# Altium PCB 遥控器.PcbDoc (part 2 of 2)
Units mil, origin at the board's own origin, x right, y up, seen from the top; angles counter-clockwise.
Board outline 3238.38 x 2687.2 mil, 2 copper layers (Top Layer, Bottom Layer); 70 components, 52 nets, 262 pads, 78 vias.
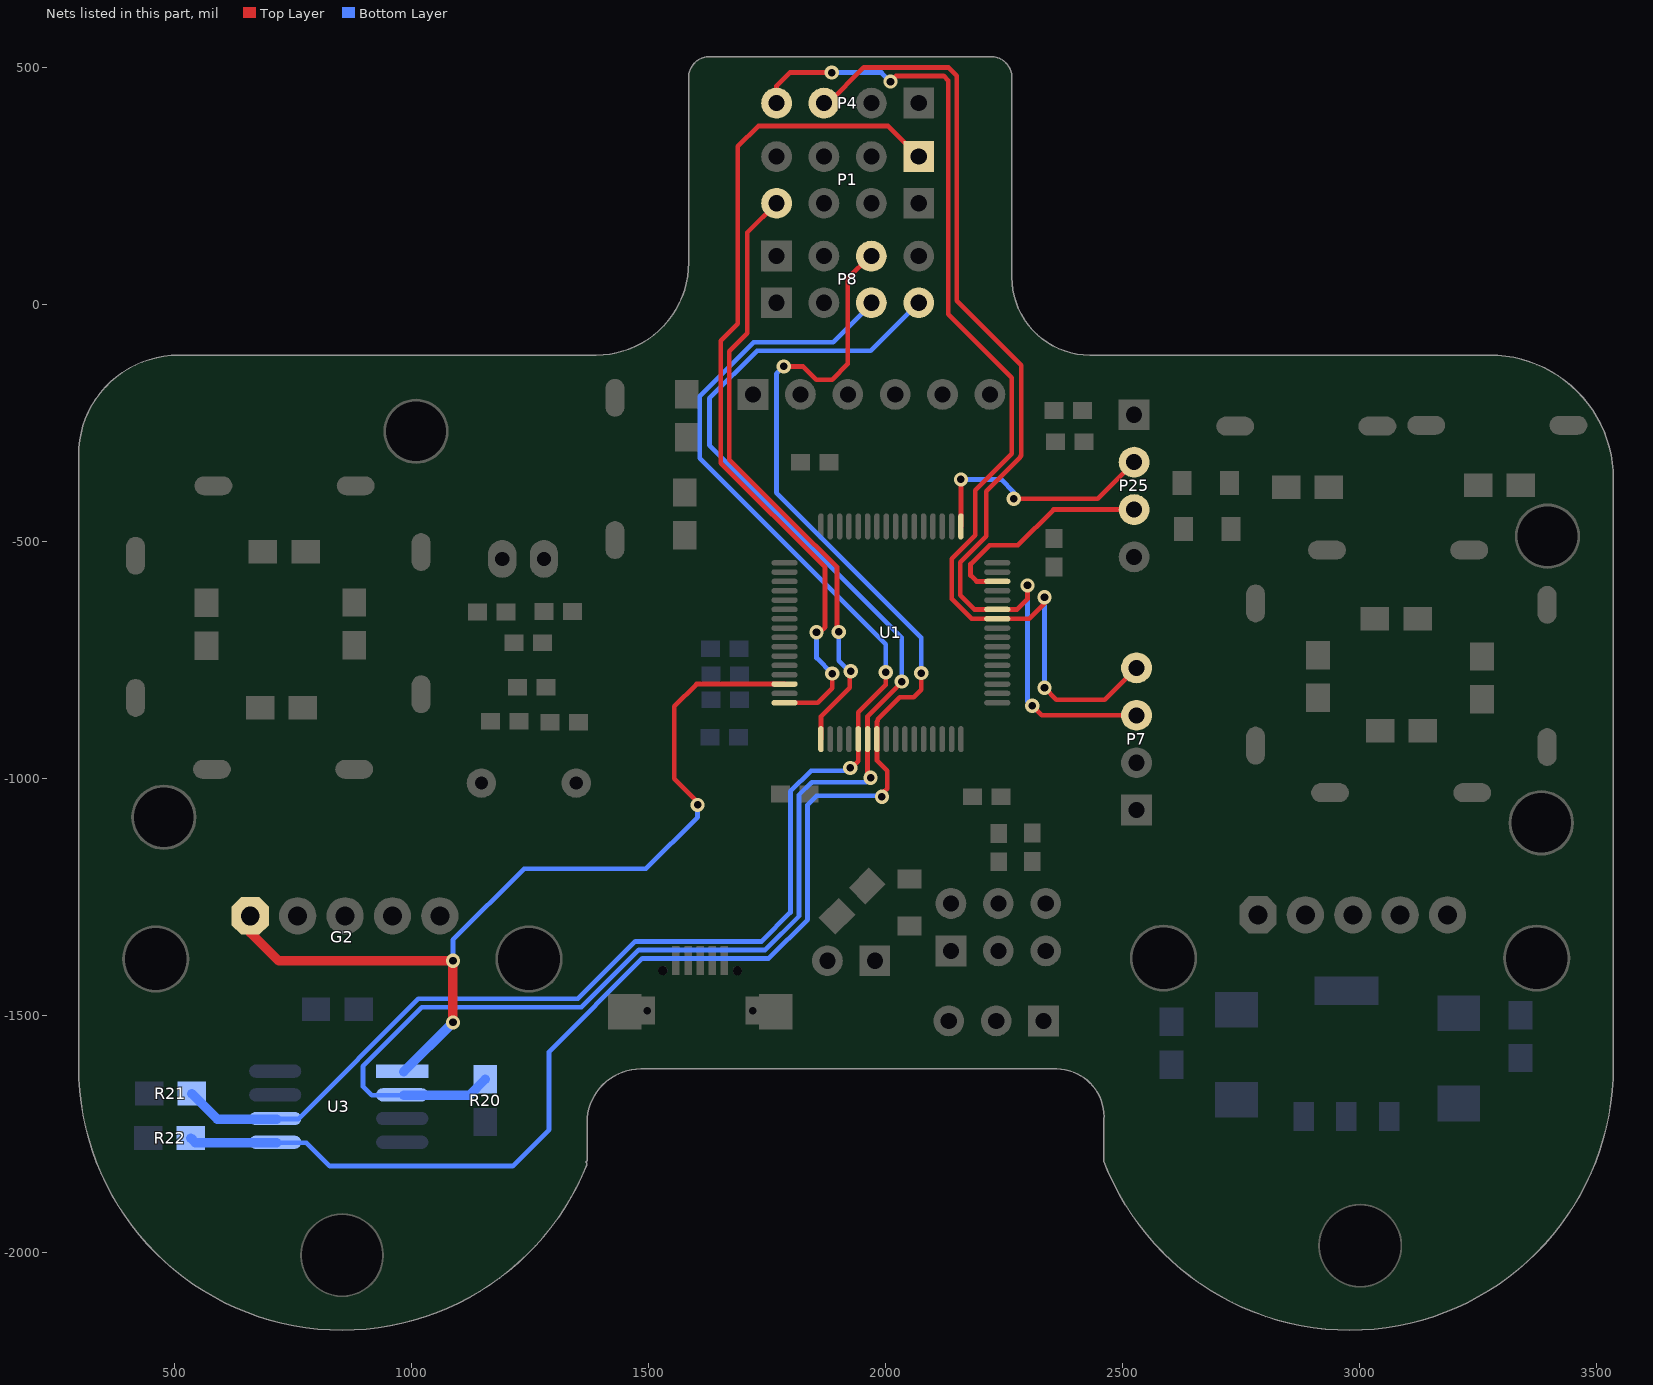
[diagram p2: the nets of this part, all layers, seen from the top]

## Via types
v1: diameter 30, hole 16, Top Layer to Bottom Layer, 42 vias
v2: diameter 50, hole 25, Top Layer to Bottom Layer, 12 vias
v3: diameter 30, hole 15, Top Layer to Bottom Layer, 10 vias
v4: diameter 40, hole 20, Top Layer to Bottom Layer, 9 vias
v5: diameter 40, hole 25, Top Layer to Bottom Layer, 5 vias

## Nets (pads, with @x,y where several pads share a name; then routed paths per layer and width w, separated by ;. In a path a pad name is that pad's centre, name@x,y a point inside that pad or via, vN(x,y) a via of type N, cw(c..) or ccw(c..) an arc to the next point about the centre after c; other vN are vias at no path point) (continued)
SPI1_CLK: P8.5 R21.1 U1.21 U3.6 | length 3297.1
  Top Layer w10: v1(1925,-978) 1925,-981 1942.02,-963.98 U1.21@1942.02,-917.32 1942.02,-860.98 2000,-803 v1(2000,-776)
  Bottom Layer w10: U3.6@715.01,-1718.77 760.23,-1718.77 1013.95,-1465.05 1350.61,-1465.05 1471.65,-1344 1738,-1344 1799,-1283 1799,-1027.54 1842.54,-984 1919,-984 v1(1925,-978) ; P8.5@1969.66,3.39 1969.66,0.66 1889,-80 1721.18,-80 1607.5,-193.68 1607.5,-324.5 2000,-717 v1(2000,-776)
  Bottom Layer w20: R21.1@536,-1665 589.77,-1718.77 U3.6@715.01,-1718.77
SPI1_MISO: P8.7 R20.1 U1.22 U3.2 | length 3321.1
  Top Layer w10: v1(1968,-999) 1968,-1000.42 1961.71,-1006.71 U1.22@1961.71,-917.32 1961.71,-869.29 2023,-808
  Bottom Layer w10: U3.2@983.01,-1668.77 915.77,-1668.77 897,-1650 897,-1607.46 1021.41,-1483.05 1358.06,-1483.05 1479.11,-1362 1745.46,-1362 1817,-1290.46 1817,-1035 1844,-1008 1845,-1009 1846,-1008 1959,-1008 v1(1968,-999) ; v1(2034,-796) 2034,-703 1628,-297 1628,-198.64 1728.64,-98 1968.27,-98 P8.7@2069.66,3.39
  Bottom Layer w20: U3.2@983.01,-1668.77 1121.23,-1668.77 R20.1@1155,-1635
SPI1_MOSI: P8.6 R22.1 U1.23 U3.5 | length 3553.6
  Top Layer w10: v1(1785,-131) 1825.28,-131 1853.28,-159 1886.68,-159 1920,-125.68 1920,55 1966.82,101.82 P8.6@1969.66,101.82 ; v1@1996,-1028.79 2003,-1021.79 2003,-984 1981.75,-962.75 1981.75,-917.68 U1.23@1981.39,-917.32 1981.39,-880.61 1983.08,-878.92 1983.08,-875.47 2029.54,-829 2059,-829 2075,-813 v1(2075,-778)
  Bottom Layer w10: U3.5@715.01,-1768.77 777.77,-1768.77 827,-1818 1213,-1818 1289.73,-1741.27 1289.73,-1576.84 1486.57,-1380 1752.91,-1380 1835,-1297.91 1835,-1056 1854,-1037 1990,-1037 v1(1992,-1039) ; v1(1785,-131) 1769.5,-146.5 1769.5,-397.5 2075,-703 v1(2075,-778)
  Bottom Layer w20: R22.1@534,-1759 543.77,-1768.77 U3.5@715.01,-1768.77
SWCLK: P25.2 U1.49 | length 521.4
  Top Layer w10: U1.49@2158.56,-468.5 v1(2158.56,-369.44) ; v1(2270,-410) 2446.88,-410 P25.2@2523.95,-332.93
  Bottom Layer w10: v1(2158.56,-369.44) 2243.44,-369.44 2270,-396 v1(2270,-410)
SWDIO: P25.3 U1.46 | length 478.2
  Top Layer w10: U1.46@2235.33,-584.65 2191.65,-584.65 2179,-572 2179,-548 2219,-508 2279,-508 2354.07,-432.93 P25.3@2523.95,-432.93
USART1_RX: P4.3 P7.3 U1.43 | length 2203.5
  Top Layer w10: P4.3@1869.66,424.56 1878.73,424.56 1954,499.83 2132.17,499.83 2150,482 2150,7.46 2286,-128.54 2286,-319 2284,-321 2284,-322.46 2212,-394.46 2212,-489.54 2157,-544.54 2157,-614 2186.7,-643.7 U1.43@2235.33,-643.7 2277.3,-643.7 2299,-622 v1(2299,-593) ; v1(2309,-847) 2329.07,-867.07 P7.3@2529.05,-867.07
  Bottom Layer w10: v1(2299,-593) 2299,-837 v1(2309,-847)
USART1_TX: P4.4 P7.4 U1.42 | length 2291.6
  Top Layer w10: P4.4@1769.66,424.56 1769.66,460.66 1798,489 v1(1886,489) ; v1(2010,470) 2021.83,481.83 2122.29,481.83 2132,472.12 2132,-21 2266,-155 2266,-315 2189,-392 2189,-487.09 2139,-537.09 2139,-621.46 2180.93,-663.39 U1.42@2235.33,-663.39 2302.61,-663.39 2335,-631 v1(2335,-618) ; v1(2335,-809) 2360,-834 2462.12,-834 P7.4@2529.05,-767.07
  Bottom Layer w10: v1(1886,489) 1991,489 v1(2010,470) ; v1(2335,-809) v1(2335,-618)
USART2_RX: P1.8 U1.17 | length 1309.1
  Top Layer w10: P1.8@1769.66,213.2 1708,151.54 1708,-61 1670,-99 1670,-327.54 1850.5,-508.04 1851.04,-508.04 1897,-554 1897,-687 v1(1901,-691) ; U1.17@1863.28,-917.32 1863.28,-869.72 1924,-809 v1@1924,-770
  Bottom Layer w10: v1(1901,-691) 1901,-752 1923,-774 v1(1926,-774)
USART2_TX: P1.1 U1.16 | length 1813.5
  Top Layer w10: U1.16@1786.51,-840.55 1856.45,-840.55 1887,-810 v1(1887,-779) ; v1(1854,-692) 1861,-692 1872,-681 1872,-555 1652,-335 1652,-77 1688,-41 1688,333 1731,376 2005.29,376 P1.1@2069.66,311.63
  Bottom Layer w10: v1(1854,-692) 1854,-746 v1(1887,-779)
W25_CS: G2.1 U1.14 U3.1 | length 1938.1
  Top Layer w10: v1(1603,-1056) 1603,-1050 1554,-1001 1554,-848 1600.82,-801.18 U1.14@1786.51,-801.18
  Top Layer w20: G2.1@659.33,-1290.08 659.33,-1325.33 719,-1385 v1(1087,-1385) v1(1087,-1515)
  Bottom Layer w10: v1(1087,-1385) 1087,-1341 1237,-1191 1494,-1191 1603,-1082 v1(1603,-1056)
  Bottom Layer w20: U3.1@983.01,-1618.77 1086.78,-1515 v1(1087,-1515)
pads on no net: G1.0 G2.0 P0.3 P1.3 P1.4 P1.5 U1.1 U1.2 U1.30 U1.34 U1.35 U1.44 U1.45 U1.50 U1.51 U1.52 U1.53 U1.54 U1.57 USB. USB.2 USB.3 USB.4 USB.6
copper on no net: | length 11328.6
  Top Layer w0.2: 2172.4,277.2 2188.8,277.2 ; 2172.4,277.4 2189.2,277.4 ; 2172.6,277 2188.4,277 ; 2172.6,277.6 2189.6,277.6 ; 2172.8,276.8 2188,276.8 ; 2172.8,277.8 2190,277.8 ; 2173,276.6 2187.6,276.6 ; 2173,278 2190.4,278 ; 2173.2,276.4 2187.4,276.4 ; 2173.2,278.2 2190.8,278.2 ; 2173.4,276.2 2187,276.2 ; 2173.4,278.4 2191.2,278.4 ; 2173.6,276 2186.6,276 ; 2173.6,278.6 2191.6,278.6 ; 2173.8,275.8 2186.4,275.8 ; 2173.8,278.8 2192.2,278.8 ; 2174,275.6 2186,275.6 ; 2174,279 2192.6,279 ; 2174.2,275.4 2185.8,275.4 ; 2174.2,279.2 2193,279.2 ; 2174.4,275.2 2185.4,275.2 ; 2174.6,275 2185.2,275 ; 2174.6,279.4 2193.6,279.4 ; 2174.8,274.8 2184.8,274.8 ; 2174.8,279.6 2194.2,279.6 ; 2175,274.6 2184.6,274.6 ; 2175,279.8 2194.8,279.8 ; 2175.2,274.4 2184.2,274.4 ; 2175.2,280 2195.4,280 ; 2175.4,274.2 2184,274.2 ; 2175.4,280.2 2196,280.2 ; 2175.6,274 2183.8,274 ; 2175.6,280.4 2196.6,280.4 ; 2175.8,273.8 2183.4,273.8 ; 2176,273.6 2183.2,273.6 ; 2176,280.6 2197.4,280.6 ; 2176.2,273.4 2183,273.4 ; 2176.2,280.8 2198.2,280.8 ; 2176.4,273.2 2182.6,273.2 ; 2176.4,281 2199,281 ; 2176.6,273 2182.4,273 ; 2176.6,281.2 2200,281.2 ; 2176.8,272.8 2182.2,272.8 ; 2177,272.6 2182,272.6 ; 2177,281.4 2201.2,281.4 ; 2177.2,272.4 2181.8,272.4 ; 2177.2,281.6 2202.6,281.6 ; 2177.4,272.2 2181.4,272.2 ; 2177.4,281.8 2204.6,281.8 ; 2177.6,272 2181.2,272 ; 2177.8,271.8 2181,271.8 ; 2177.8,282 2237.4,282 ; 2178,271.6 2180.8,271.6 ; 2178,282.2 2237.2,282.2 ; 2178.2,271.4 2180.6,271.4 ; 2178.2,282.4 2237,282.4 ; 2178.4,271.2 2180.4,271.2 ; 2178.6,271 2180.2,271 ; 2178.6,282.6 2236.6,282.6 ; 2178.8,270.8 2180,270.8 ; 2178.8,282.8 2236.4,282.8 ; 2179,270.6 2179.8,270.6 ; 2179.2,270.4 2179.6,270.4 ; 2179.2,283 2236,283 ; 2179.4,283.2 2235.8,283.2 ; 2179.6,283.4 2235.6,283.4 ; 2180,283.6 2235.2,283.6 ; 2180.4,283.8 2235,283.8 ; 2180.6,284 2234.6,284 ; 2181,284.2 2234.2,284.2 ; 2181.2,284.4 2234,284.4 ; 2181.6,284.6 2233.6,284.6 ; 2181.8,284.8 2233.4,284.8 ; 2182.2,285 2233,285 ; 2182.6,285.2 2232.6,285.2 ; 2183,285.4 2232.2,285.4 ; 2183.2,285.6 2232,285.6 ; 2183.6,285.8 2231.6,285.8 ; 2184,286 2231.2,286 ; 2184.4,286.2 2230.8,286.2 ; 2184.8,286.4 2230.4,286.4 ; 2185.2,286.6 2230,286.6 ; 2185.6,286.8 2229.6,286.8 ; 2186,287 2229.2,287 ; 2186.4,263.2 2228.8,263.2 ; 2186.4,287.2 2228.8,287.2 ; 2186.6,263 2228.8,263 ; 2186.6,263.4 2228.6,263.4 ; 2186.8,262.8 2228.6,262.8 ; 2186.8,263.6 2228.4,263.6 ; 2186.8,287.4 2228.4,287.4 ; 2187,262.6 2228.4,262.6 ; 2187,263.8 2228.2,263.8 ; 2187.2,262.4 2228.2,262.4 ; 2187.2,264 2228,264 ; 2187.2,287.6 2228,287.6 ; 2187.4,262.2 2228,262.2 ; 2187.6,262 2227.8,262 ; 2187.6,264.2 2227.6,264.2 ; 2187.8,261.8 2205.4,261.8 ; 2187.8,264.4 2227.4,264.4 ; 2187.8,287.8 2227.4,287.8 ; 2188,261.6 2204,261.6 ; 2188,264.6 2227.2,264.6 ; 2188.2,261.4 2203,261.4 ; 2188.2,264.8 2227,264.8 ; 2188.2,288 2227,288 ; 2188.4,261.2 2202.2,261.2 ; 2188.4,265 2226.8,265 ; 2188.6,261 2201.6,261 ; 2188.6,265.2 2226.6,265.2 ; 2188.6,288.2 2226.6,288.2 ; 2188.8,260.8 2201,260.8 ; 2189,260.6 2200.4,260.6 ; 2189,265.4 2226.2,265.4 ; 2189.2,260.4 2200,260.4 ; 2189.2,265.6 2226,265.6 ; 2189.2,288.4 2226,288.4 ; 2189.4,260.2 2199.4,260.2 ; 2189.4,265.8 2225.8,265.8 ; 2189.6,260 2199,260 ; 2189.6,266 2225.6,266 ; 2189.8,259.8 2198.6,259.8 ; 2189.8,288.6 2225.4,288.6 ; 2190,259.6 2198.2,259.6 ; 2190,266.2 2225.2,266.2 ; 2190.2,259.4 2197.8,259.4 ; 2190.2,266.4 2225,266.4 ; 2190.2,288.8 2225,288.8 ; 2190.4,259.2 2197.6,259.2 ; 2190.6,259 2197.2,259 ; 2190.6,266.6 2224.6,266.6 ; 2190.8,258.8 2196.8,258.8 ; 2190.8,266.8 2224.4,266.8 ; 2190.8,289 2224.4,289 ; 2191,258.6 2196.6,258.6 ; 2191.2,258.4 2196.2,258.4 ; 2191.2,267 2224,267 ; 2191.4,258.2 2196,258.2 ; 2191.4,267.2 2223.8,267.2 ; 2191.4,289.2 2223.8,289.2 ; 2191.6,258 2195.6,258 ; 2191.8,257.8 2195.4,257.8 ; 2191.8,267.4 2223.4,267.4 ; 2192,257.6 2195.2,257.6 ; 2192,267.6 2223.2,267.6 ; 2192,289.4 2223.2,289.4 ; 2192.2,257.4 2195,257.4 ; 2192.4,257.2 2194.6,257.2 ; 2192.4,267.8 2222.8,267.8 ; 2192.6,257 2194.4,257 ; 2192.6,289.6 2222.6,289.6 ; 2192.8,256.8 2194.2,256.8 ; 2192.8,268 2222.4,268 ; 2193,256.6 2194,256.6 ; 2193.2,256.4 2193.8,256.4 ; 2193.2,268.2 2222,268.2 ; 2193.2,289.8 2222,289.8 ; 2193.4,256.2 2193.6,256.2 ; 2193.4,268.4 2221.8,268.4 ; 2193.8,268.6 2221.4,268.6 ; 2193.8,290 2221.4,290 ; 2194.2,268.8 2221,268.8 ; 2194.6,269 2220.6,269 ; 2194.6,290.2 2220.6,290.2 ; 2195,269.2 2220,269.2 ; 2195.4,290.4 2219.8,290.4 ; 2195.6,269.4 2219.6,269.4 ; 2196,269.6 2219.2,269.6 ; 2196.2,290.6 2219,290.6 ; 2196.6,269.8 2218.6,269.8 ; 2197,270 2218.2,270 ; 2197.2,290.8 2218,290.8 ; 2197.6,270.2 2217.6,270.2 ; 2198.2,270.4 2217,270.4 ; 2198.2,291 2217,291 ; 2198.8,270.6 2216.4,270.6 ; 2199.2,291.2 2216,291.2 ; 2199.4,270.8 2215.8,270.8 ; 2200.2,271 2215,271 ; 2200.6,249 2214.6,249 ; 2200.6,291.4 2214.6,291.4 ; 2200.8,248.8 2214.6,248.8 ; 2200.8,249.2 2214.4,249.2 ; 2201,248.6 2214.4,248.6 ; 2201,249.4 2214.2,249.4 ; 2201,271.2 2214.2,271.2 ; 2201.2,248.4 2214.2,248.4 ; 2201.2,249.6 2214,249.6 ; 2201.4,248.2 2214,248.2 ; 2201.4,249.8 2213.8,249.8 ; 2201.6,248 2213.8,248 ; 2201.6,250 2213.6,250 ; 2201.8,247.8 2213.6,247.8 ; 2202,247.6 2213.4,247.6 ; 2202,250.2 2213.2,250.2 ; 2202,271.4 2213.2,271.4 ; 2202.2,247.4 2213.2,247.4 ; 2202.2,250.4 2213,250.4 ; 2202.2,291.6 2213,291.6 ; 2202.4,247.2 2213,247.2 ; 2202.6,247 2212.8,247 ; 2202.6,250.6 2212.6,250.6 ; 2202.8,246.8 2212.6,246.8 ; 2203,246.6 2212.4,246.6 ; 2203,250.8 2212.2,250.8 ; 2203.2,246.4 2212.2,246.4 ; 2203.2,271.6 2212,271.6 ; 2203.4,246.2 2212,246.2 ; 2203.4,251 2211.8,251 ; 2203.6,246 2211.8,246 ; 2203.8,245.8 2211.6,245.8 ; 2203.8,251.2 2211.4,251.2 ; 2204,245.6 2211.4,245.6 ; 2204.2,245.4 2211.2,245.4 ; 2204.4,245.2 2211,245.2 ; 2204.4,251.4 2210.8,251.4 ; 2204.4,291.8 2210.8,291.8 ; 2204.6,245 2210.8,245 ; 2204.8,244.8 2210.6,244.8 ; 2205,244.6 2210.4,244.6 ; 2205,251.6 2210.2,251.6 ; 2205,271.8 2210.2,271.8 ; 2205.2,244.4 2210.2,244.4 ; 2205.4,244.2 2210,244.2 ; 2205.6,244 2209.8,244 ; 2205.8,243.8 2209.6,243.8 ; 2206,243.6 2209.4,243.6 ; 2206,251.8 2209.2,251.8 ; 2206.2,243.4 2209.2,243.4 ; 2206.4,243.2 2209,243.2 ; 2206.6,243 2208.8,243 ; 2206.8,242.8 2208.6,242.8 ; 2207,242.6 2208.4,242.6 ; 2207.2,242.4 2208.2,242.4 ; 2207.4,242.2 2208,242.2 ; 2207.6,242 2207.8,242 ; 2209.8,261.8 2227.6,261.8 ; 2210.6,281.8 2237.8,281.8 ; 2211.2,261.6 2227.4,261.6 ; 2212.2,261.4 2227.2,261.4 ; 2212.6,281.6 2238,281.6 ; 2213,261.2 2227,261.2 ; 2213.6,261 2226.8,261 ; 2214,281.4 2238.2,281.4 ; 2214.2,260.8 2226.6,260.8 ; 2214.8,260.6 2226.4,260.6 ; 2215.2,260.4 2226.2,260.4 ; 2215.2,281.2 2238.6,281.2 ; 2215.8,260.2 2226,260.2 ; 2216.2,260 2225.8,260 ; 2216.2,281 2238.8,281 ; 2216.6,259.8 2225.6,259.8 ; 2217,259.6 2225.4,259.6 ; 2217,280.8 2239,280.8 ; 2217.4,259.4 2225.2,259.4 ; 2217.6,259.2 2225,259.2 ; 2217.8,280.6 2239.2,280.6 ; 2218,259 2224.8,259 ; 2218.4,258.8 2224.6,258.8 ; 2218.6,258.6 2224.4,258.6 ; 2218.6,280.4 2239.6,280.4 ; 2219,258.4 2224.2,258.4 ; 2219.2,258.2 2224,258.2 ; 2219.2,280.2 2239.8,280.2 ; 2219.6,258 2223.8,258 ; 2219.8,257.8 2223.6,257.8 ; 2219.8,280 2240,280 ; 2220,257.6 2223.4,257.6 ; 2220.2,257.4 2223.2,257.4 ; 2220.4,279.8 2240.2,279.8 ; 2220.6,257.2 2223,257.2 ; 2220.8,257 2222.8,257 ; 2221,256.8 2222.6,256.8 ; 2221,279.6 2240.4,279.6 ; 2221.2,256.6 2222.4,256.6 ; 2221.4,256.4 2222.2,256.4 ; 2221.6,256.2 2222,256.2 ; 2221.6,279.4 2240.6,279.4 ; 2222.2,279.2 2241,279.2 ; 2222.6,279 2241.2,279 ; 2223,278.8 2241.4,278.8 ; 2223.6,278.6 2241.6,278.6 ; 2224,278.4 2241.8,278.4 ; 2224.4,278.2 2242,278.2 ; 2224.8,278 2242.2,278 ; 2225.2,277.8 2242.4,277.8 ; 2225.6,277.6 2242.6,277.6 ; 2226,277.4 2242.8,277.4 ; 2226.4,277.2 2243,277.2 ; 2226.8,277 2242.8,277 ; 2227.2,276.8 2242.6,276.8 ; 2227.6,276.6 2242.4,276.6 ; 2227.8,276.4 2242.2,276.4 ; 2228.2,276.2 2242,276.2 ; 2228.6,276 2241.8,276 ; 2228.8,275.8 2241.6,275.8 ; 2229.2,275.6 2241.4,275.6 ; 2229.4,275.4 2241.2,275.4 ; 2229.8,275.2 2241,275.2 ; 2230,275 2240.8,275 ; 2230.4,274.8 2240.6,274.8 ; 2230.6,274.6 2240.4,274.6 ; 2231,274.4 2240.2,274.4 ; 2231.2,274.2 2240,274.2 ; 2231.4,274 2239.8,274 ; 2231.8,273.8 2239.6,273.8 ; 2232,273.6 2239.4,273.6 ; 2232.2,273.4 2239.2,273.4 ; 2232.6,273.2 2239,273.2 ; 2232.8,273 2238.8,273 ; 2233,272.8 2238.6,272.8 ; 2233.2,272.6 2238.4,272.6 ; 2233.4,272.4 2238.2,272.4 ; 2233.8,272.2 2238,272.2 ; 2234,272 2237.8,272 ; 2234.2,271.8 2237.6,271.8 ; 2234.4,271.6 2237.4,271.6 ; 2234.6,271.4 2237.2,271.4 ; 2234.8,271.2 2237,271.2 ; 2235,271 2236.8,271 ; 2235.2,270.8 2236.6,270.8 ; 2235.4,270.6 2236.4,270.6 ; 2235.6,270.4 2236.2,270.4
  Top Layer w0.4: 2170.6,439.4 2185.8,439.4 ; 2171.4,405.4 2185.8,405.4 ; 2171.4,405.8 2186.6,405.8 ; 2171.4,439 2186.6,439 ; 2171.4,439.8 2185,439.8 ; 2171.8,405 2185,405 ; 2171.8,440.2 2184.6,440.2 ; 2172.2,406.2 2187,406.2 ; 2172.2,438.6 2187.4,438.6 ; 2172.6,404.6 2184.2,404.6 ; 2172.6,406.6 2187.8,406.6 ; 2172.6,440.6 2183.8,440.6 ; 2173,407 2188.6,407 ; 2173,438.2 2187.8,438.2 ; 2173.4,404.2 2183.8,404.2 ; 2173.4,437.8 2188.6,437.8 ; 2173.4,441 2183,441 ; 2173.8,407.4 2189,407.4 ; 2174.2,403.8 2183,403.8 ; 2174.2,407.8 2189.8,407.8 ; 2174.2,437.4 2189,437.4 ; 2174.2,441.4 2182.6,441.4 ; 2174.6,403.4 2182.2,403.4 ; 2174.6,441.8 2181.8,441.8 ; 2175,437 2189.8,437 ; 2175.4,403 2181.8,403 ; 2175.4,408.2 2190.6,408.2 ; 2175.4,442.2 2181,442.2 ; 2175.8,436.6 2190.6,436.6 ; 2176.2,402.6 2181,402.6 ; 2176.2,408.6 2191,408.6 ; 2176.2,436.2 2191.4,436.2 ; 2176.2,442.6 2180.6,442.6 ; 2176.6,402.2 2180.6,402.2 ; 2176.6,409 2191.8,409 ; 2176.6,443 2179.8,443 ; 2177,435.8 2191.8,435.8 ; 2177.4,401.8 2179.8,401.8 ; 2177.4,409.4 2192.6,409.4 ; 2177.4,443.4 2179,443.4 ; 2177.8,409.8 2193,409.8 ; 2177.8,435.4 2192.6,435.4 ; 2178.2,401.4 2179,401.4 ; 2178.2,410.2 2193.8,410.2 ; 2178.2,435 2193,435 ; 2178.2,443.8 2178.6,443.8 ; 2179,410.6 2194.2,410.6 ; 2179,434.6 2193.8,434.6 ; 2179.8,411 2195.4,411 ; 2179.8,434.2 2194.6,434.2 ; 2180.2,411.4 2195.8,411.4 ; 2180.2,433.8 2195,433.8 ; 2181,411.8 2196.6,411.8 ; 2181,433.4 2195.8,433.4 ; 2181.4,433 2196.6,433 ; 2181.8,412.2 2197,412.2 ; 2182.2,412.6 2197.8,412.6 ; 2182.2,432.6 2197,432.6 ; 2183,413 2198.6,413 ; 2183,432.2 2197.8,432.2 ; 2183.8,413.4 2199.4,413.4 ; 2183.8,431.8 2198.6,431.8 ; 2184.2,431.4 2199.4,431.4 ; 2184.6,413.8 2199.8,413.8 ; 2185,414.2 2228.2,414.2 ; 2185,431 2228.6,431 ; 2185.8,414.6 2227.4,414.6 ; 2185.8,430.6 2227.8,430.6 ; 2186.2,430.2 2227.4,430.2 ; 2186.6,415 2226.6,415 ; 2187,415.4 2226.2,415.4 ; 2187,429.8 2226.6,429.8 ; 2187.4,429.4 2225.8,429.4 ; 2187.8,415.8 2225.4,415.8 ; 2188.2,429 2225,429 ; 2188.6,416.2 2224.6,416.2 ; 2189,416.6 2224.2,416.6 ; 2189,428.6 2224.6,428.6 ; 2189.8,417 2223.4,417 ; 2189.8,428.2 2223.8,428.2 ; 2190.2,427.8 2223.4,427.8 ; 2190.6,417.4 2222.6,417.4 ; 2191,427.4 2222.6,427.4 ; 2191.4,417.8 2222.2,417.8 ; 2191.8,418.2 2221.4,418.2 ; 2191.8,427 2221.8,427 ; 2192.2,426.6 2221.4,426.6 ; 2192.6,418.6 2220.6,418.6 ; 2193,426.2 2220.6,426.2 ; 2193.4,419 2220.2,419 ; 2193.8,419.4 2219.4,419.4 ; 2193.8,425.8 2219.8,425.8 ; 2194.2,425.4 2219.4,425.4 ; 2194.6,419.8 2218.6,419.8 ; 2195,420.2 2218.2,420.2 ; 2195,425 2218.6,425 ; 2195.8,420.6 2217.4,420.6 ; 2195.8,424.6 2217.8,424.6 ; 2196.2,424.2 2217,424.2 ; 2196.6,421 2216.6,421 ; 2196.6,423.8 2216.6,423.8 ; 2197,421.4 2216.2,421.4 ; 2197.4,423.4 2215.8,423.4 ; 2197.8,421.8 2215.4,421.8 ; 2198.2,422.2 2214.6,422.2 ; 2198.2,422.6 2214.6,422.6 ; 2198.2,423 2215,423 ; 2201,413.8 2212.6,413.8 ; 2201.4,381 2202.2,381 ; 2201.4,381.4 2202.6,381.4 ; 2201.4,381.8 2203.4,381.8 ; 2201.4,382.2 2204.2,382.2 ; 2201.4,382.6 2204.6,382.6 ; 2201.4,383 2205.4,383 ; 2201.4,383.4 2206.2,383.4 ; 2201.4,383.8 2206.6,383.8 ; 2201.4,384.2 2207.4,384.2 ; 2201.4,384.6 2208.2,384.6 ; 2201.4,385 2208.6,385 ; 2201.4,385.4 2209.4,385.4 ; 2201.4,385.8 2209.8,385.8 ; 2201.4,386.2 2210.6,386.2 ; 2201.4,386.6 2211.4,386.6 ; 2201.4,387 2212.2,387 ; 2201.4,387.4 2212.6,387.4 ; 2201.4,387.8 2213.4,387.8 ; 2201.4,388.2 2214.2,388.2 ; 2201.4,388.6 2214.6,388.6 ; 2201.4,389 2215.4,389 ; 2201.4,389.4 2216.2,389.4 ; 2201.4,389.8 2217,389.8 ; 2201.4,390.2 2217.4,390.2 ; 2201.4,390.6 2218.2,390.6 ; 2201.4,391 2219,391 ; 2201.4,391.4 2219.4,391.4 ; 2201.4,391.8 2220.2,391.8 ; 2201.4,392.2 2220.6,392.2 ; 2201.4,392.6 2221.4,392.6 ; 2201.4,393 2222.2,393 ; 2201.4,393.4 2222.6,393.4 ; 2201.4,393.8 2223.4,393.8 ; 2201.4,394.2 2224.2,394.2 ; 2201.4,394.6 2225,394.6 ; 2201.4,395 2225.4,395 ; 2201.4,395.4 2226.2,395.4 ; 2201.4,395.8 2227,395.8 ; 2201.4,396.2 2227.4,396.2 ; 2201.4,396.6 2228.2,396.6 ; 2201.4,397 2212.6,397 ; 2201.4,397.4 2212.6,397.4 ; 2201.4,397.8 2212.6,397.8 ; 2201.4,398.2 2212.6,398.2 ; 2201.4,398.6 2212.6,398.6 ; 2201.4,399 2212.6,399 ; 2201.4,399.4 2212.6,399.4 ; 2201.4,399.8 2212.6,399.8 ; 2201.4,400.2 2212.6,400.2 ; 2201.4,400.6 2212.6,400.6 ; 2201.4,401 2212.6,401 ; 2201.4,401.4 2212.6,401.4 ; 2201.4,401.8 2212.6,401.8 ; 2201.4,402.2 2212.6,402.2 ; 2201.4,402.6 2212.6,402.6 ; 2201.4,403 2212.6,403 ; 2201.4,403.4 2212.6,403.4 ; 2201.4,403.8 2212.6,403.8 ; 2201.4,404.2 2212.6,404.2 ; 2201.4,404.6 2212.6,404.6 ; 2201.4,405 2212.6,405 ; 2201.4,405.4 2212.6,405.4 ; 2201.4,405.8 2212.6,405.8 ; 2201.4,406.2 2212.6,406.2 ; 2201.4,406.6 2212.6,406.6 ; 2201.4,407 2212.6,407 ; 2201.4,407.4 2212.6,407.4 ; 2201.4,407.8 2212.6,407.8 ; 2201.4,408.2 2212.6,408.2 ; 2201.4,408.6 2212.6,408.6 ; 2201.4,409 2212.6,409 ; 2201.4,409.4 2212.6,409.4 ; 2201.4,409.8 2212.6,409.8 ; 2201.4,410.2 2212.6,410.2 ; 2201.4,410.6 2212.6,410.6 ; 2201.4,411 2212.6,411 ; 2201.4,411.4 2212.6,411.4 ; 2201.4,411.8 2212.6,411.8 ; 2201.4,412.2 2212.6,412.2 ; 2201.4,412.6 2212.6,412.6 ; 2201.4,413 2212.6,413 ; 2201.4,413.4 2212.2,413.4 ; 2201.4,431.4 2212.2,431.4 ; 2201.4,431.8 2212.6,431.8 ; 2201.4,432.2 2212.6,432.2 ; 2201.4,432.6 2212.2,432.6 ; 2201.4,433 2212.6,433 ; 2201.4,433.4 2212.6,433.4 ; 2201.4,433.8 2212.6,433.8 ; 2201.4,434.2 2212.6,434.2 ; 2201.4,434.6 2212.6,434.6 ; 2201.4,435 2212.6,435 ; 2201.4,435.4 2212.6,435.4 ; 2201.4,435.8 2212.6,435.8 ; 2201.4,436.2 2212.6,436.2 ; 2201.4,436.6 2212.6,436.6 ; 2201.4,437 2212.6,437 ; 2201.4,437.4 2212.6,437.4 ; 2201.4,437.8 2212.6,437.8 ; 2201.4,438.2 2212.6,438.2 ; 2201.4,438.6 2212.6,438.6 ; 2201.4,439 2212.6,439 ; 2201.4,439.4 2212.6,439.4 ; 2201.4,439.8 2212.6,439.8 ; 2201.4,440.2 2212.6,440.2 ; 2201.4,440.6 2212.6,440.6 ; 2201.4,441 2212.6,441 ; 2201.4,441.4 2212.6,441.4 ; 2201.4,441.8 2212.6,441.8 ; 2201.4,442.2 2212.6,442.2 ; 2201.4,442.6 2212.6,442.6 ; 2201.4,443 2212.6,443 ; 2201.4,443.4 2212.6,443.4 ; 2201.4,443.8 2212.6,443.8 ; 2201.4,444.2 2212.6,444.2 ; 2201.4,444.6 2212.6,444.6 ; 2201.4,445 2212.2,445 ; 2201.4,445.4 2212.6,445.4 ; 2201.4,445.8 2212.6,445.8 ; 2201.4,446.2 2212.2,446.2 ; 2201.4,446.6 2212.6,446.6 ; 2201.4,447 2212.6,447 ; 2201.4,447.4 2212.2,447.4 ; 2201.4,447.8 2212.6,447.8 ; 2201.4,448.2 2228.2,448.2 ; 2201.4,448.6 2227.8,448.6 ; 2201.4,449 2227,449 ; 2201.4,449.4 2226.2,449.4 ; 2201.4,449.8 2225.8,449.8 ; 2201.4,450.2 2225,450.2 ; 2201.4,450.6 2224.6,450.6 ; 2201.4,451 2223.8,451 ; 2201.4,451.4 2223,451.4 ; 2201.4,451.8 2222.2,451.8 ; 2201.4,452.2 2221.8,452.2 ; 2201.4,452.6 2221,452.6 ; 2201.4,453 2220.6,453 ; 2201.4,453.4 2219.8,453.4 ; 2201.4,453.8 2219,453.8 ; 2201.4,454.2 2218.2,454.2 ; 2201.4,454.6 2217.8,454.6 ; 2201.4,455 2217,455 ; 2201.4,455.4 2216.2,455.4 ; 2201.4,455.8 2215.8,455.8 ; 2201.4,456.2 2215,456.2 ; 2201.4,456.6 2214.2,456.6 ; 2201.4,457 2213.4,457 ; 2201.4,457.4 2213,457.4 ; 2201.4,457.8 2212.2,457.8 ; 2201.4,458.2 2211.4,458.2 ; 2201.4,458.6 2211,458.6 ; 2201.4,459 2210.2,459 ; 2201.4,459.4 2209.8,459.4 ; 2201.4,459.8 2209,459.8 ; 2201.4,460.2 2208.2,460.2 ; 2201.4,460.6 2207.8,460.6 ; 2201.4,461 2207,461 ; 2201.4,461.4 2206.2,461.4 ; 2201.4,461.8 2205.4,461.8 ; 2201.4,462.2 2205,462.2 ; 2201.4,462.6 2204.2,462.6 ; 2201.4,463 2203.4,463 ; 2201.4,463.4 2203,463.4 ; 2201.4,463.8 2202.2,463.8 ; 2201.4,464.2 2201.8,464.2 ; 2213.4,397 2229,397 ; 2213.4,413.8 2228.6,413.8 ; 2213.8,431.4 2229.4,431.4 ; 2213.8,447.8 2229,447.8 ; 2214.2,397.4 2229.4,397.4 ; 2214.2,413.4 2229.4,413.4 ; 2214.2,447.4 2229.8,447.4 ; 2214.6,431.8 2229.8,431.8 ; 2215,397.8 2230.2,397.8 ; 2215,413 2230.2,413 ; 2215,432.2 2230.6,432.2 ; 2215,447 2230.6,447 ; 2215.4,398.2 2231,398.2 ; 2215.4,412.6 2231,412.6 ; 2215.8,432.6 2231.4,432.6 ; 2215.8,446.6 2231,446.6 ; 2216.2,398.6 2231.4,398.6 ; 2216.2,412.2 2231.4,412.2 ; 2216.2,446.2 2231.8,446.2 ; 2216.6,399 2232.2,399 ; 2216.6,411.8 2232.2,411.8 ; 2216.6,433 2231.8,433 ; 2217,433.4 2232.6,433.4 ; 2217,445.8 2232.6,445.8 ; 2217.4,399.4 2232.6,399.4 ; 2217.4,411.4 2232.6,411.4 ; 2217.8,433.8 2233.4,433.8 ; 2217.8,445.4 2233,445.4 ; 2218.2,399.8 2233.8,399.8 ; 2218.2,411 2233.4,411 ; 2218.2,445 2233.8,445 ; 2218.6,434.2 2233.8,434.2 ; 2219,400.2 2234.2,400.2 ; 2219,410.6 2234.2,410.6 ; 2219,434.6 2234.6,434.6 ; 2219,444.6 2234.6,444.6 ; 2219.4,400.6 2235,400.6 ; 2219.4,410.2 2234.6,410.2 ; 2219.8,435 2235.4,435 ; 2219.8,444.2 2235,444.2 ; 2220.2,401 2235.4,401 ; 2220.2,409.8 2235.4,409.8 ; 2220.2,443.8 2235.8,443.8 ; 2220.6,435.4 2235.8,435.4 ; 2221,401.4 2236.2,401.4 ; 2221,409.4 2236.2,409.4 ; 2221,443.4 2236.6,443.4 ; 2221.4,401.8 2237,401.8 ; 2221.4,409 2236.6,409 ; 2221.4,435.8 2236.6,435.8 ; 2221.8,436.2 2237.4,436.2 ; 2221.8,443 2237,443 ; 2222.2,402.2 2237.4,402.2 ; 2222.2,408.6 2237.4,408.6 ; 2222.6,402.6 2238.2,402.6 ; 2222.6,436.6 2237.8,436.6 ; 2222.6,442.6 2237.8,442.6 ; 2223,408.2 2238.2,408.2 ; 2223,437 2238.6,437 ; 2223,442.2 2238.6,442.2 ; 2223.4,403 2239,403 ; 2223.4,407.8 2239,407.8 ; 2223.8,437.4 2239.4,437.4 ; 2223.8,441.8 2239,441.8 ; 2224.2,403.4 2239.4,403.4 ; 2224.2,407.4 2239.4,407.4 ; 2224.2,441.4 2239.8,441.4 ; 2224.6,437.8 2240.2,437.8 ; 2225,403.8 2240.2,403.8 ; 2225,407 2240.2,407 ; 2225,441 2240.6,441 ; 2225.4,406.6 2241,406.6 ; 2225.4,438.2 2240.6,438.2 ; 2225.8,404.2 2241,404.2 ; 2225.8,438.6 2241.4,438.6 ; 2225.8,440.6 2241,440.6 ; 2226.2,404.6 2241.8,404.6 ; 2226.2,406.2 2241.4,406.2 ; 2226.6,439 2242.2,439 ; 2226.6,440.2 2241.8,440.2 ; 2227,405 2242.2,405 ; 2227,405.4 2243,405.4 ; 2227,405.8 2242.2,405.8 ; 2227,439.4 2242.6,439.4 ; 2227,439.8 2242.6,439.8

## Polygon pours and split planes (outlines as drawn)
GND on Top Layer "Top Layer-No Net" (solid, remove dead copper, pour order 4): 1469,-13 1515,33 1515,619 2322,619 2419,522 2423,518 2423,70 3369,70 3572,-133 3636,-197 3636,-1591 3636,-1992 3360,-2268 3355,-2273 717,-2273 509,-2273 122,-1886 159,-1849 159,-378 159,-87 293,47 297,51 1441,51 1455,51 1520,116
GND on Bottom Layer "Top Layer-No Net" (solid, remove dead copper, pour order 6): 1478,28 1478,660 1510,692 1560,642 2364,642 2364,106 2428,42 2506,-36 3484,-36 3498,-36 3646,-184 3618,-212 3618,-1858 3618,-1886 3231,-2273 3222,-2264 998,-2264 584,-2264 279,-1959 233,-1913 233,-304 233,-124 413,56 1483,56

## Keep-outs
Top Layer:
  lines w10: 2175,25 2248,25
Keep-Out Layer:
  lines w10: 1364.61,-1813.65 cw(c853.17,-1608.16) 853.17,-2159.34 cw(c853.17,-1608.16) 301.98,-1608.16 301.98,-318.56 cw(c508.45,-318.56) 508.45,-112.09 1389.14,-112.09 ccw(c1389.14,88.07) 1589.31,88.07 1589.31,478.46 cw(c1628.68,478.46) 1628.68,517.83 2221.75,517.83 cw(c2221.75,478.46) 2261.12,478.46 2261.12,57.4 ccw(c2430.62,57.4) 2430.62,-112.09 3273.83,-112.09 cw(c3273.83,-368.6) 3530.33,-368.6 3530.33,-1608.16 cw(c2979.15,-1608.16) 2979.15,-2159.34 cw(c2979.15,-1608.16) 2464.71,-1806.02 2464.71,-1723.64 ; 1364.98,-1813.65 1364.98,-1726.27 cw(c1483.09,-1726.27) 1483.09,-1608.16 2366,-1608.16 ; 2361.05,-1608.19 cw(c2359.85,-1713.85) 2464.71,-1727

## Other copper
Top Layer:
  text "NRF" at 2169,118 h50

## Silkscreen, mask and mechanical layers (free items; w line width, h text height)
Top Overlay:
  text "-" at 1699,-136 h150
  text "A8" at 2852,-166 h60
  text "C9" at 3243,-166 h60
  text "3.3V" at 2584,-249 h60
  text "SWCLK" at 2286,-356 h60
  text "SWDIO" at 2294,-434 h60
  text "-" at 2415,-584 h150
  text "B0" at 703,-606 h60
  text "B1" at 615,-688 h60
  text "C5" at 768,-688 h60
  text "C7" at 3063,-748 h60
  text "TX1" at 2588,-788 h60
  text "C6" at 2963,-800 h60
  text "B10" at 690,-803 h60
  text "C8" at 3155,-804 h60
  text "B15" at 3047,-850 h60
  text "RX1" at 2591,-886 h60
  text "-" at 2604,-998 h150
  text "3.3V" at 2594,-1088 h60
  text "1" at 2415,-1296 h98.43
  text "0" at 2412,-1406 h98.43
  text "+" at 2118,-1469 h98.43
  text "-" at 2320,-1469 h150
  text "ON" at 2312,-1601 h50
  text "+" at 1964,-1621 h98.43
  text "-" at 1858,-1626 h150
Bottom Overlay:
  text "RX1" at 1869,471 h60
  text "TX1" at 1763,470 h60
  text "+5" at 2115,467 h60
  text "-" at 1985,462 h150
  text "TX2" at 2220,309 h60
  text "-" at 1703,278 h150
  text "RX2" at 1725,194 h60
  text "+3.3" at 2225,191 h60
  text "+3.3" at 1730,85 h60
  text "-" at 1706,-29 h150
Top Solder:
  drawing of 682 lines, arcs and shapes, not listed
  text "NRF" at 2169,118 h50

## Text inside footprints (layer, text, board x,y; h text height)
USB: Top Overlay "+" at 1478.57,-1378.11 h39.37